# Allegro board modbusDTU.brd
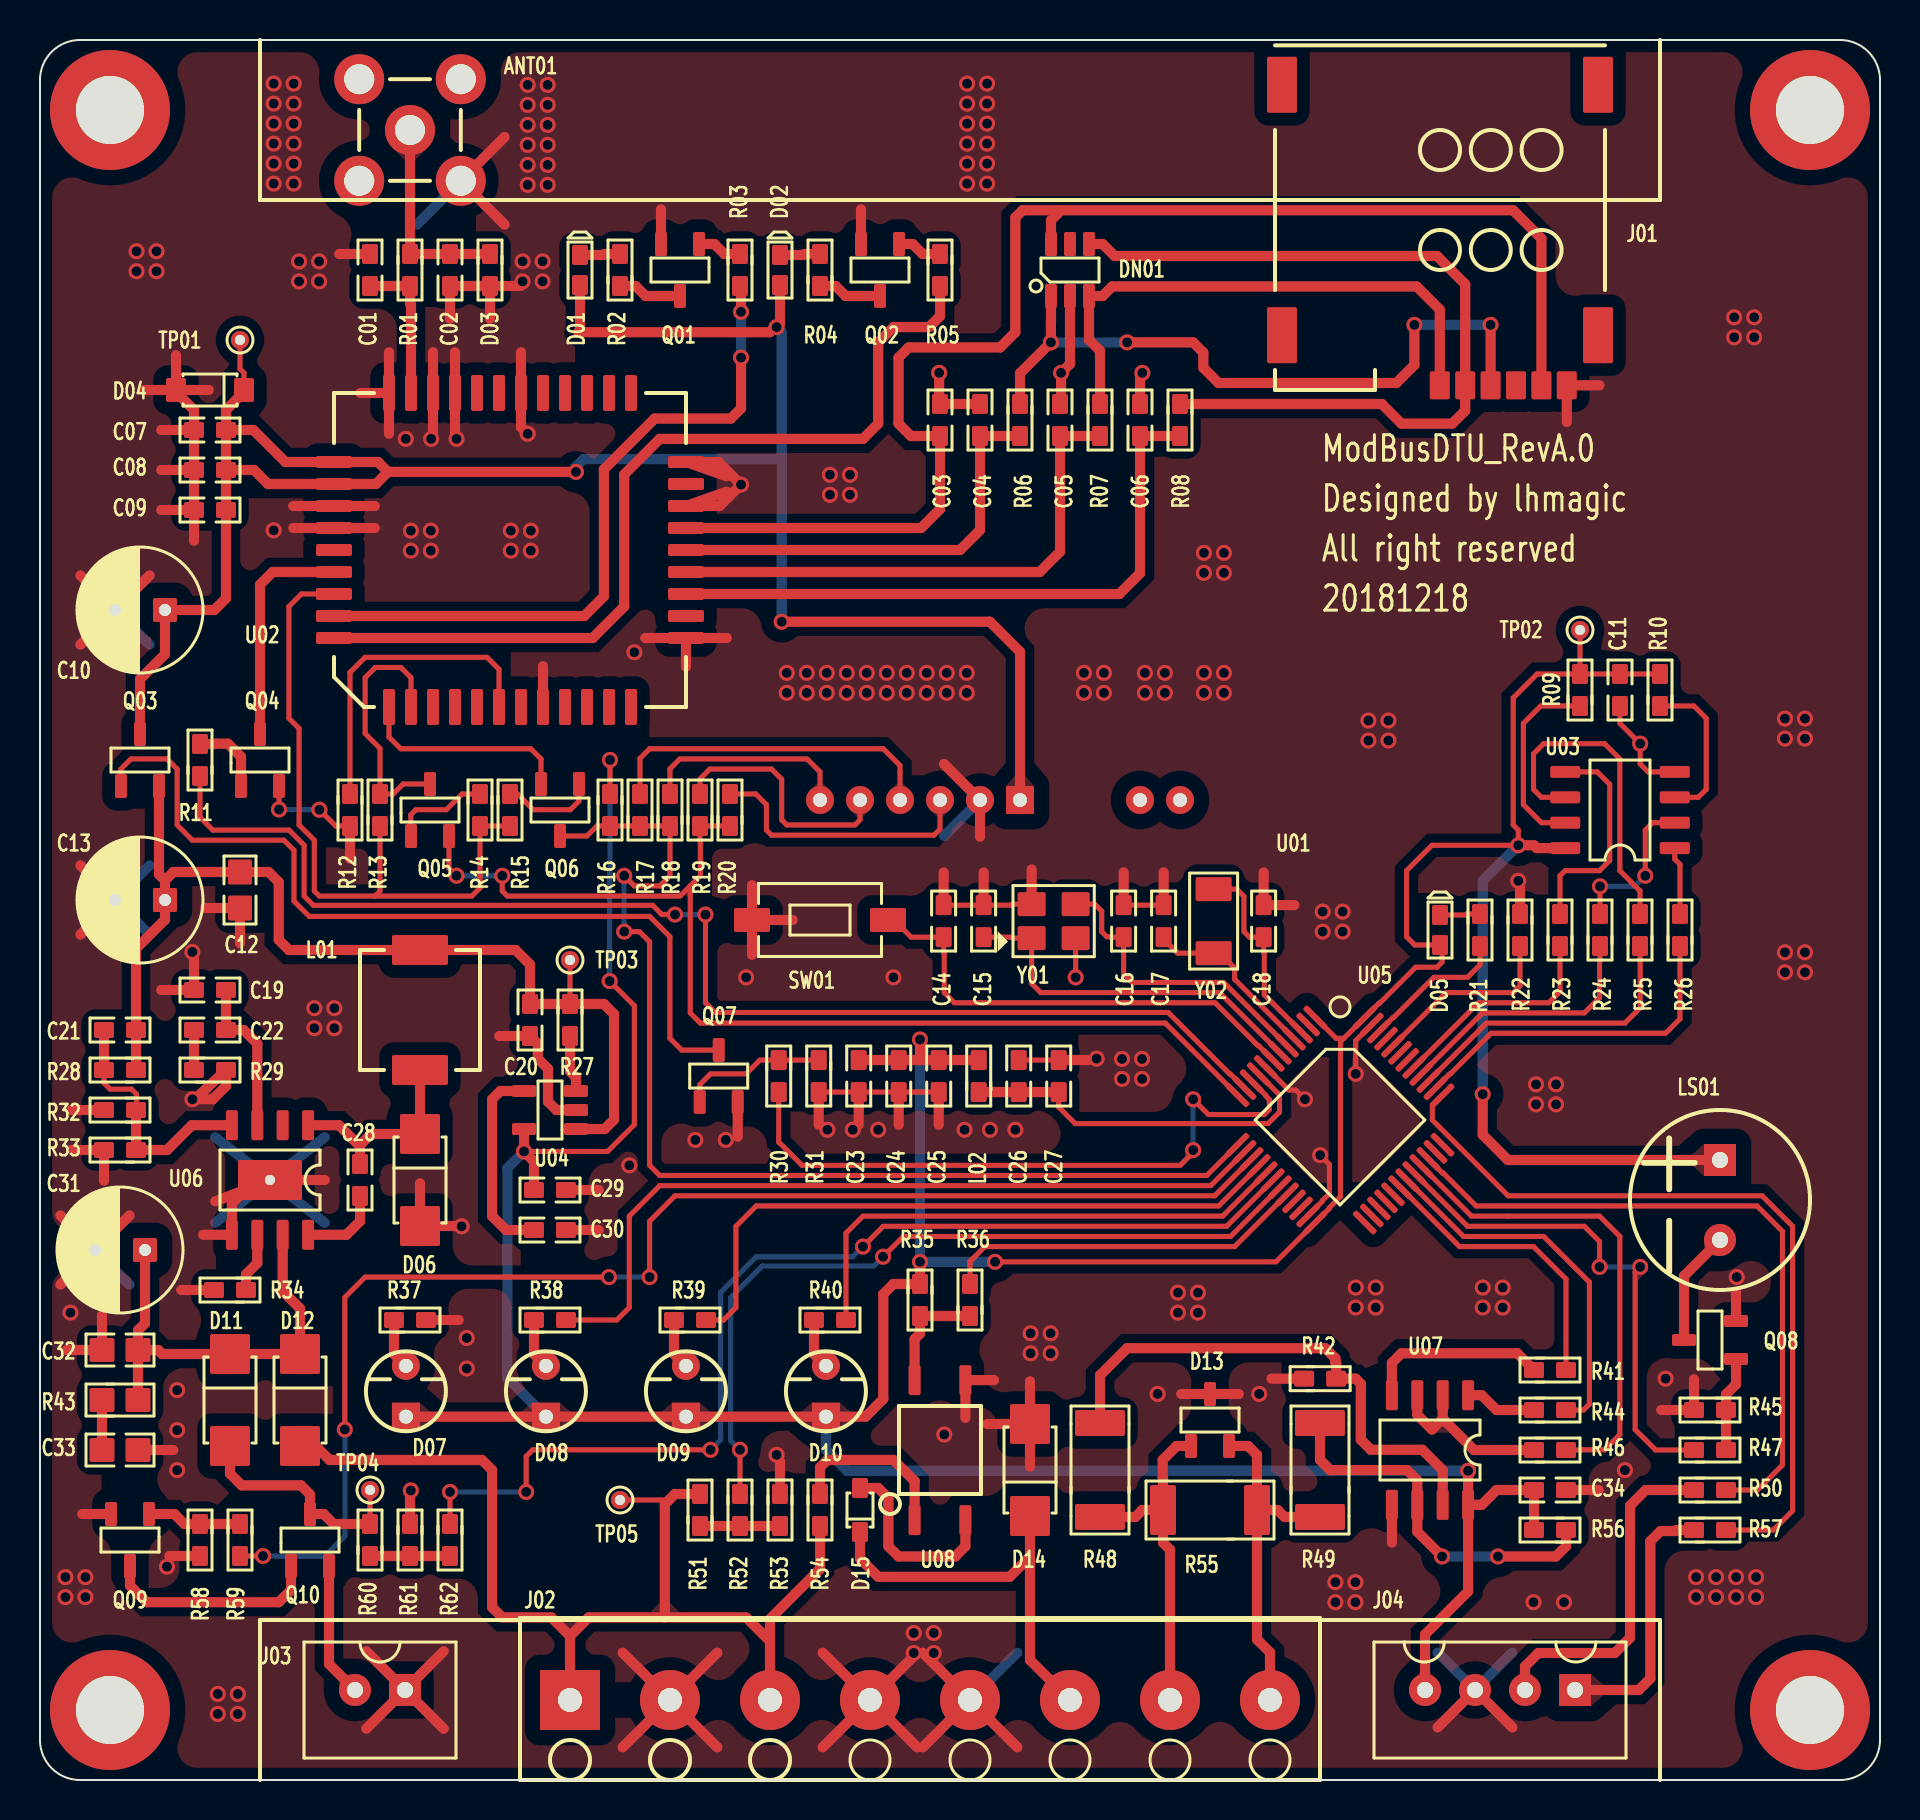
[diagram p0: board, top side]
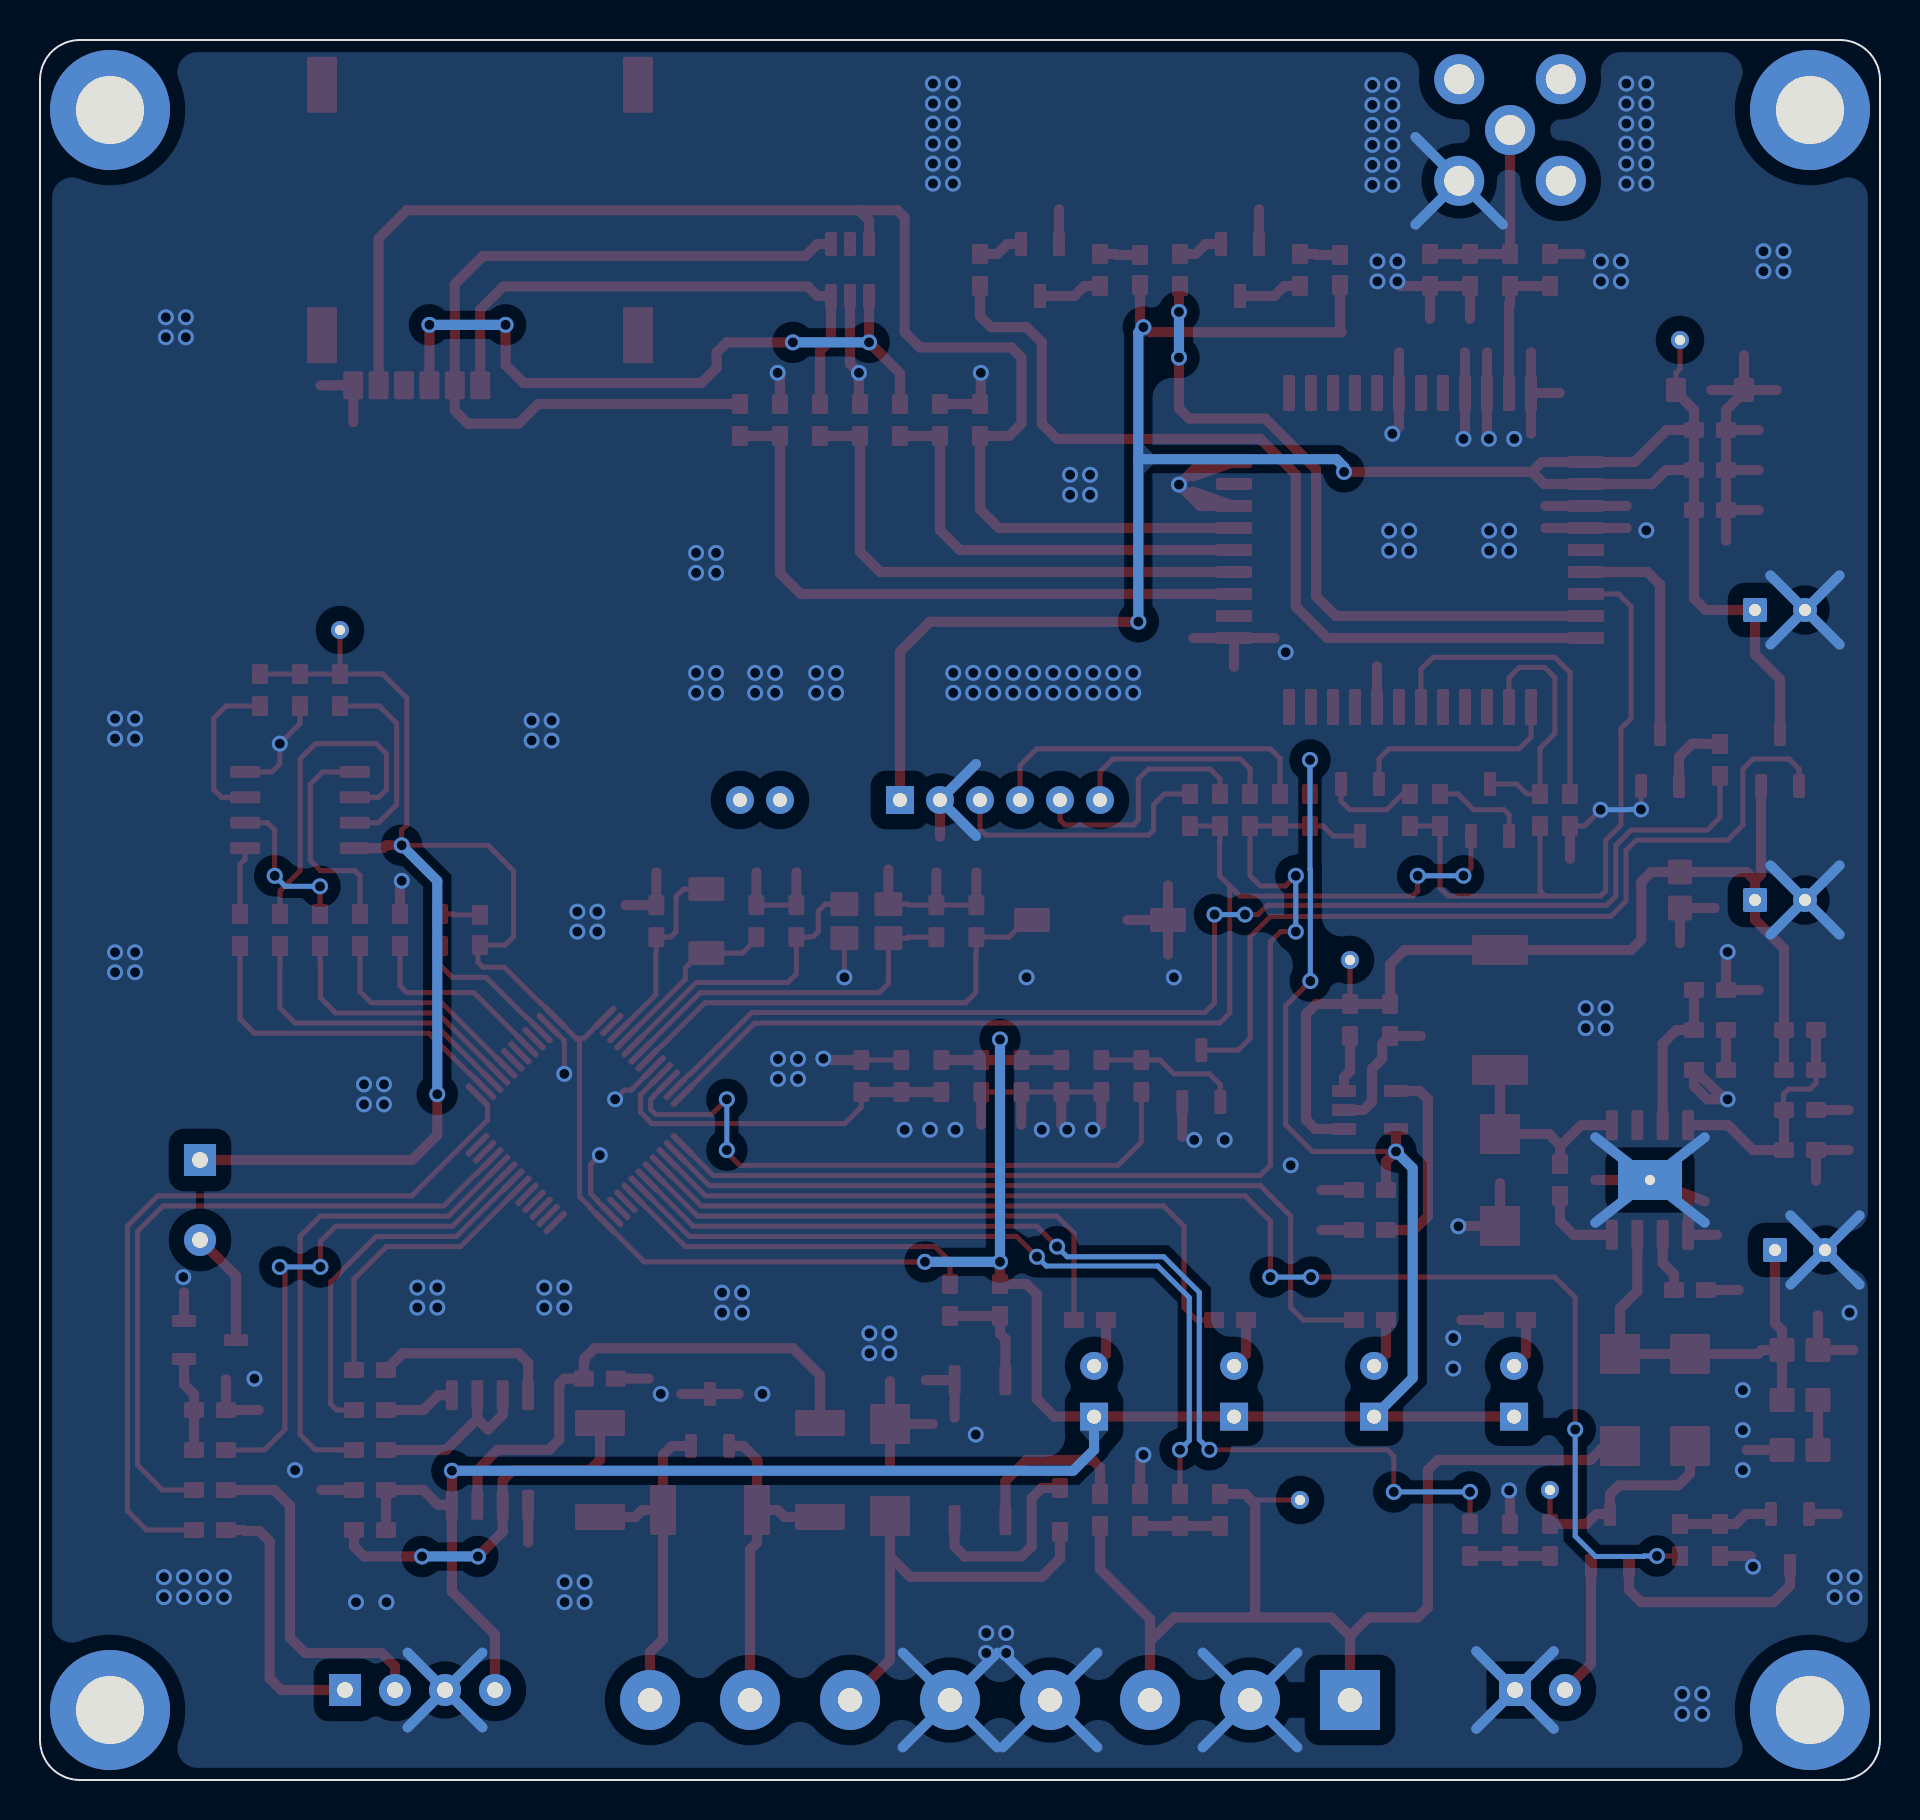
[diagram p1: board, bottom side, seen from below]

Outline 92 x 87 mm; copper layers: TOP, BOTTOM. Coordinates in mm from the lower left corner of the outline.
Outline path: 0,85 0,2 arc(0.59,0.59) 2,0 90,0 arc(91.41,0.59) 92,2 92,85 arc(91.41,86.41) 90,87 2,87 arc(0.59,86.41) 0,85

## Design rules (mm)
constraint set DEFAULT: min track width 0.254

## Placement (name value [footprint] x y rotation side)
ANT01  ANT  [RF-SMA]  18.5 82.5 270 top
C01  NF  [C0603]  16.5 75.5 90 top
C02  NF  [C0603]  20.5 75.5 270 top
C03  0.1uF  [C0603]  45 68 90 top
C04  22pF  [C0603]  47 68 90 top
C05  22pF  [C0603]  51 68 90 top
C06  22pF  [C0603]  55 68 90 top
C07  33pF  [C0603]  8.5 67.5 180 top
C08  10pF  [C0603]  8.5 65.5 180 top
C09  2.2uF/16V  [C0603]  8.5 63.5 180 top
C10  100uF/16V  [CAPE6X2R50]  5 58.5 180 top
C11  0.1uF  [C0603]  79 54.5 270 top
C12  10uF/10v  [C0805]  10 44.5 270 top
C13  100uF/16V  [CAPE6X2R50]  5 44 180 top
C14  0.1uF  [C0603]  45.18 42.94 90 top
C15  33pF  [C0603]  47.18 42.94 90 top
C16  33pF  [C0603]  54.18 42.94 90 top
C17  22pF  [C0603]  56.18 42.94 90 top
C18  22pF  [C0603]  61.18 42.94 90 top
C19  10pF  [C0603]  8.5 39.5 180 top
C20  2.2uF/16V  [C0603]  24.5 38 270 top
C21  10pF  [C0603]  4 37.5 180 top
C22  150pF  [C0603]  8.5 37.5 180 top
C23  0.1uF  [C0603]  40.94 35.2 270 top
C24  0.1uF  [C0603]  42.94 35.2 270 top
C25  4.7uF  [C0603]  44.94 35.2 270 top
C26  10nF  [C0603]  48.94 35.2 90 top
C27  1uF  [C0603]  50.94 35.2 90 top
C28  0.1uF  [C0603]  16 30 270 top
C29  2.2uF/16V  [C0603]  25.5 29.5 0 top
C30  22nF  [C0603]  25.5 27.5 0 top
C31  47uF/50V  [CAPE6X2R50]  4 26.5 180 top
C32  2.2uF/50V  [C0805]  4 21.5 0 top
C33  2.2uF/50V  [C0805]  4 16.5 180 top
C34  0.1uF  [C0603]  75.5 14.5 0 top
D01  RED  [LED0603]  27 75.5 270 top
D02  GREEN  [LED0603]  37 75.5 270 top
D03  PGB1010603NR  [R0603]  22.5 75.5 90 top
D04  MM1Z5V1  [SOD-123]  8.5 69.5 180 top
D05  RED  [LED0603]  70 42.5 270 top
D06  SS14  [SMA]  19 30 270 top
D07  RED  [LED-3MM]  18.3 19.44 90 top
D08  GREEN  [LED-3MM]  25.3 19.44 90 top
D09  GREEN  [LED-3MM]  32.3 19.44 90 top
D10  GREEN  [LED-3MM]  39.3 19.44 90 top
D11  SS14  [SMA]  9.5 19 270 top
D12  SS14  [SMA]  13 19 270 top
D13  PSM712  [SOT23-3]  58.5 18 270 top
D14  SMAJ36CA  [SMA]  49.5 15.5 90 top
D15  1N4148WS  [SOD-323]  41 13.5 90 top
DN01  ESDA6V1-5SC6  [SOT23-6]  51.5 75.5 270 top
J01  SIM-002-T6  [SIM-MICRO]  70 78.5 180 top
J02  CONN PCB 8  [CON5MM-8P]  39 4 0 top
J03  CONN PCB 2  [XH-2A]  17 4.5 180 top
J04  SWD  [XH-4A]  73 4.5 180 top
L01  SLO0630H150MTT  [INDC-SLF6028]  19 38.5 90 top
L02  CBG160808U600T  [R0603]  46.94 35.2 270 top
LS01  QMB-09B-03  [BZ09B]  84 29 270 top
NOREF  -  [unnamed]  3.5 83.5 90 top
NOREF#2  -  [unnamed]  3.5 3.5 90 top
NOREF#3  -  [unnamed]  88.5 83.5 90 top
NOREF#4  -  [#2]  0 0 0 top
NOREF#5  -  [unnamed]  88.5 3.5 90 top
NOREF#6  -  [#2]  -2 0 90 top
Q01  2N7002  [SOT23-3]  32 75.5 90 top
Q02  2N7002  [SOT23-3]  42 75.5 90 top
Q03  AO3401A  [SOT23-3]  5 51 270 top
Q04  2N7002  [SOT23-3]  11 51 270 top
Q05  MMBT5551  [SOT23-3]  19.5 48.5 270 top
Q06  MMBT5551  [SOT23-3]  26 48.5 90 top
Q07  2N7002  [SOT23-3]  33.94 35.2 270 top
Q08  2N7002  [SOT23-3]  83.5 22 0 top
Q09  2N7002  [SOT23-3]  4.5 12 90 top
Q10  AO3401A  [SOT23-3]  13.5 12 270 top
R01  0R  [R0603]  18.5 75.5 90 top
R02  1K  [R0603]  29 75.5 270 top
R03  1K  [R0603]  35 75.5 90 top
R04  1K  [R0603]  39 75.5 270 top
R05  1K  [R0603]  45 75.5 90 top
R06  51R  [R0603]  49 68 90 top
R07  51R  [R0603]  53 68 90 top
R08  51R  [R0603]  57 68 90 top
R09  10K  [R0603]  77 54.5 270 top
R10  10K  [R0603]  81 54.5 270 top
R11  1K  [R0603]  8 51 270 top
R12  10K  [R0603]  15.5 48.5 90 top
R13  10K  [R0603]  17 48.5 270 top
R14  1K  [R0603]  22 48.5 90 top
R15  1K  [R0603]  23.5 48.5 90 top
R16  10K  [R0603]  28.5 48.5 90 top
R17  100R  [R0603]  30 48.5 270 top
R18  NF  [R0603]  31.5 48.5 270 top
R19  NF  [R0603]  33 48.5 270 top
R20  100R  [R0603]  34.5 48.5 270 top
R21  1K  [R0603]  72 42.5 90 top
R22  10K  [R0603]  74 42.5 90 top
R23  1K  [R0603]  76 42.5 270 top
R24  1K  [R0603]  78 42.5 270 top
R25  1K  [R0603]  80 42.5 270 top
R26  1K  [R0603]  82 42.5 270 top
R27  10K  [R0603]  26.5 38 90 top
R28  100K  [R0603]  4 35.5 0 top
R29  100K  [R0603]  8.5 35.5 180 top
R30  1K  [R0603]  36.94 35.2 90 top
R31  10K  [R0603]  38.94 35.2 90 top
R32  100K  [R0603]  4 33.5 0 top
R33  24K  [R0603]  4 31.5 0 top
R34  200K  [R0603]  9.5 24.5 0 top
R35  30K  [R0603]  44 24 90 top
R36  1K  [R0603]  46.5 24 270 top
R37  1K  [R0603]  18.5 23 180 top
R38  1K  [R0603]  25.5 23 180 top
R39  1K  [R0603]  32.5 23 180 top
R40  1K  [R0603]  39.5 23 180 top
R41  1K  [R0603]  75.5 20.5 180 top
R42  4.7K  [R0603]  64.01 20.07 180 top
R43  2R  [R0805]  4 19 180 top
R44  1K  [R0603]  75.5 18.5 180 top
R45  10K  [R0603]  83.5 18.5 0 top
R46  1K  [R0603]  75.5 16.5 180 top
R47  1K  [R0603]  83.5 16.5 180 top
R48  22R  [R2010]  53 15.5 270 top
R49  22R  [R2010]  64 15.5 270 top
R50  100R  [R0603]  83.5 14.5 180 top
R51  100K  [R0603]  33 13.5 270 top
R52  1K  [R0603]  35 13.5 90 top
R53  10K  [R0603]  37 13.5 90 top
R54  20K  [R0603]  39 13.5 90 top
R55  120R  [R2010]  58.5 13.5 0 top
R56  4.7K  [R0603]  75.5 12.5 0 top
R57  100R  [R0603]  83.5 12.5 180 top
R58  10K  [R0603]  8 12 90 top
R59  1K  [R0603]  10 12 90 top
R60  100K  [R0603]  16.5 12 270 top
R61  33K  [R0603]  18.5 12 90 top
R62  1K  [R0603]  20.5 12 90 top
SW01  SW-PB-2  [SW-3X6]  39 43 180 top
TP01  TP  [TP1]  10 72 0 top
TP02  TP  [TP1]  77 57.5 0 top
TP03  TP  [TP1]  26.5 41 0 top
TP04  TP  [TP1]  16.5 14.5 0 top
TP05  TP  [TP1]  29 14 0 top
U01  -  [SIM800C_P0V0]  49 49 180 top
U02  -  [SIM800C]  23.5 61.5 90 top
U03  P25Q40  [SOIC-8]  79 48.5 90 top
U04  RT9193-33GB  [SOT23-5]  25.5 33.5 0 top
U05  STM32F030C8  [LQFP-48]  65 33 225 top
U06  MP2560  [SOIC-8P]  11.5 30 180 top
U07  SP3485  [SOIC-8]  69.5 16.5 180 top
U08  EL354  [SOP-4]  45 16.5 90 top
Y01  12MHz  [SMD3225-4]  50.68 42.94 0 top
Y02  32.768K  [SMD3215]  58.68 42.94 90 top

## Library data of the parts
ANT01 = ANT
C01 C02 C03 C04 C05 C06 C07 C08 C09 C11 C14-C18 C23-C27 C34 = CAP NP
C10 C13 C31 = CAP POL
C12 C19 C21 C22 C28 C32 C33 = CAP NP: room: MP2560
C20 C29 C30 = CAP NP: room: MP2451
D01 D02 D05 D07 D08 D09 D10 = LED
D03 = DIODE BI-DIR
D04 = DIODE ZENER
D06 = DIODE SCHOTTKY: room: MP2560
D11 D12 = DIODE SCHOTTKY: room: MP2451
D13 = TVS_BD
D14 = DIODE TVS
D15 = DIODE
DN01 = DTVSARR_CA_5/SOT23
J01 = SIM
J02 = CONN PCB 8
J03 = CONN PCB 2
J04 = CONN PCB 4
L01 L02 = INDUCTOR
LS01 = BUZZER
Q01 Q02 Q04 Q07 Q08 Q09 = NMOS
Q03 Q10 = PMOS
Q05 Q06 = NPN
R01 R02 R03 R04 R05 R09-R11 R13-R26 R30 R35-R57 R59-R62 = RES
R06 R07 R08 R12 R27 R31 R58 = RES: room: MP2451
R28 R29 R32 R34 = RES: room: MP2560
R33 = RESISTOR
SW01 = SW-PB-2
TP01 TP02 TP03 TP04 TP05 = TP
U01 = SIM800C_P0V0
U02 = SIM800C
U03 = W25Q16
U04 = RT9193
U05 = STM32F030C8
U06 = MP2560
U07 = SP485
U08 = EL354
Y01 = CRYSTAL-1
Y02 = CRYSTAL

## Footprints (pads in the part's own frame, mm; a bottom-side part is the same pattern mirrored in y, then rotated)
BZ09B
  rect 1.6x1.6 hole 0.8: 1(-2,0)
  round 1.6 hole 0.8: 2(2,0)
C0603
  rrect 1x0.8 smd: 1(-0.8,0) 2(0.8,0)
C0805
  rrect 1.25x1.2 smd: 1(-0.9,0) 2(0.9,0)
CAPE6X2R50
  rrect 1.2x1.2 hole 0.6: 1(-1.25,0)
  round 1.2 hole 0.6: 2(1.25,0)
CON5MM-8P
  rect 3x3 hole 1.2: 1(-12.5,0)
  round 3 hole 1.2: 2(-7.5,0) 3(-2.5,0) 4(2.5,0) 5(7.5,0) 6(12.5,0) 7(17.5,0) 8(22.5,0)
INDC-SLF6028
  rrect 1.5x2.8 smd: 1(-3,0) 2(3,0)
LED0603
  rrect 1x0.8 smd: 1(0.75,0) 2(-0.75,0)
LED-3MM
  rect 1.4x1.4 hole 0.7: 1(-1.27,0)
  round 1.4 hole 0.7: 2(1.27,0)
LQFP-48
  rrect 0.3x1.5 smd: 1(-2.75,-4.5) 2(-2.25,-4.5) 3(-1.75,-4.5) 4(-1.25,-4.5) 5(-0.75,-4.5) 6(-0.25,-4.5) 7(0.25,-4.5) 8(0.75,-4.5) 9(1.25,-4.5) 10(1.75,-4.5) 11(2.25,-4.5) 12(2.75,-4.5) 25(2.75,4.5) 26(2.25,4.5) 27(1.75,4.5) 28(1.25,4.5) 29(0.75,4.5) 30(0.25,4.5) 31(-0.25,4.5) 32(-0.75,4.5) 33(-1.25,4.5) 34(-1.75,4.5) 35(-2.25,4.5) 36(-2.75,4.5)
  rrect 1.5x0.3 smd: 13(4.5,-2.75) 14(4.5,-2.25) 15(4.5,-1.75) 16(4.5,-1.25) 17(4.5,-0.75) 18(4.5,-0.25) 19(4.5,0.25) 20(4.5,0.75) 21(4.5,1.25) 22(4.5,1.75) 23(4.5,2.25) 24(4.5,2.75) 37(-4.5,2.75) 38(-4.5,2.25) 39(-4.5,1.75) 40(-4.5,1.25) 41(-4.5,0.75) 42(-4.5,0.25) 43(-4.5,-0.25) 44(-4.5,-0.75) 45(-4.5,-1.25) 46(-4.5,-1.75) 47(-4.5,-2.25) 48(-4.5,-2.75)
R0603
  rrect 1x0.8 smd: 1(-0.8,0) 2(0.8,0)
R0805
  rrect 1.25x1.2 smd: 1(-0.9,0) 2(0.9,0)
R2010
  rrect 1.3x2.5 smd: 1(-2.35,0) 2(2.35,0)
RF-SMA
  round 2.5 hole 1.5: (-2.54,2.54) (-2.54,-2.54) (2.54,-2.54) 1(0,0) 2(2.54,2.54)
SIM800C
  rrect 1.8x0.6 smd: 1(-7.85,6.05) 2(-7.85,4.95) 3(-7.85,3.85) 4(-7.85,2.75) 5(-7.85,1.65) 6(-7.85,0.55) 7(-7.85,-0.55) 8(-7.85,-1.65) 9(-7.85,-2.75) 10(-7.85,-3.85) 11(-7.85,-4.95) 12(-7.85,-6.05) 22(7.85,-6.05) 23(7.85,-4.95) 24(7.85,-3.85) 25(7.85,-2.75) 26(7.85,-1.65) 27(7.85,-0.55) 28(7.85,0.55) 29(7.85,1.65) 30(7.85,2.75) 31(7.85,3.85) 32(7.85,4.95) 33(7.85,6.05)
  rrect 0.6x1.8 smd: 13(-4.4,-8.8) 14(-3.3,-8.8) 15(-2.2,-8.8) 16(-1.1,-8.8) 17(0,-8.8) 18(1.1,-8.8) 19(2.2,-8.8) 20(3.3,-8.8) 21(4.4,-8.8) 34(4.4,8.8) 35(3.3,8.8) 36(2.2,8.8) 37(1.1,8.8) 38(0,8.8) 39(-1.1,8.8) 40(-2.2,8.8) 41(-3.3,8.8) 42(-4.4,8.8)
SIM800C_P0V0
  round 1.4 hole 0.7: (-8,0) (-6,0) 2(2,0) 3(4,0) 4(6,0) 5(8,0) 6(10,0)
  rect 1.4x1.4 hole 0.7: 1(0,0)
SIM-MICRO
  rrect 1.5x2.8 smd: (-7.9,6.26) (-7.9,-6.26) (7.9,6.26) (7.9,-6.26)
  rrect 1x1.4 smd: 1(-5.07,8.765) 2(-2.53,8.765) 3(0.01,8.765) 4(-6.34,8.765) 5(-3.8,8.765) 6(-1.26,8.765)
SMA
  rrect 2x2 smd: 1(2.3,0) 2(-2.3,0)
SMD3215
  rrect 1.2x1.8 smd: 1(-1.6,0) 2(1.6,0)
SMD3225-4
  rrect 1.4x1.2 smd: 1(-1.1,-0.85) 2(1.1,-0.85) 3(1.1,0.85) 4(-1.1,0.85)
SOD-123
  rrect 1x1.2 smd: 1(1.7,0) 2(-1.7,0)
SOD-323
  rrect 1x0.8 smd: 1(1.1,0) 2(-1.1,0)
SOIC-8
  rrect 0.6x1.5 smd: 1(-1.905,-2.74) 2(-0.635,-2.74) 3(0.635,-2.74) 4(1.905,-2.74) 5(1.905,2.74) 6(0.635,2.74) 7(-0.635,2.74) 8(-1.905,2.74)
SOIC-8P
  rrect 0.6x1.5 smd: 1(-1.905,-2.74) 2(-0.635,-2.74) 3(0.635,-2.74) 4(1.905,-2.74) 5(1.905,2.74) 6(0.635,2.74) 7(-0.635,2.74) 8(-1.905,2.74)
  rrect 3.2x2 hole 0.5: 9(0,0)
SOP-4
  rrect 1.5x0.6 smd: 1(-3.505,1.27) 2(-3.505,-1.27) 3(3.495,-1.27) 4(3.495,1.27)
SOT23-3
  rrect 1.2x0.6 smd: 1(1.3,-0.95) 2(1.3,0.95) 3(-1.3,0)
SOT23-5
  rrect 1.2x0.6 smd: 1(1.3,-0.95) 2(1.3,0) 3(1.3,0.95) 4(-1.3,0.95) 5(-1.3,-0.95)
SOT23-6
  rrect 1.2x0.6 smd: 1(1.3,-0.95) 2(1.3,0) 3(1.3,0.95) 4(-1.3,0.95) 5(-1.3,0) 6(-1.3,-0.95)
SW-3X6
  rrect 1.8x1.2 smd: 1(-3.4,0) 2(3.4,0)
TP1
  round 0.9 hole 0.5: 1(0,0)
unnamed
  round 6 hole 3.4: (0,0)
XH-2A
  rect 1.6x1.6 hole 0.8: 1(-1.25,0)
  round 1.6 hole 0.8: 2(1.25,0)
XH-4A
  rect 1.6x1.6 hole 0.8: 1(-3.75,0)
  round 1.6 hole 0.8: 2(-1.25,0) 3(1.25,0) 4(3.75,0)

## Nets
+3V3: C11.1 C23.1 C24.1 C25.1 C29.1 C34.1 D05.1(CATHODE) D07.1(CATHODE) D08.1(CATHODE) D09.1(CATHODE) D10.1(CATHODE) J04.4 L02.1 LS01.1 R09.1 R10.1 R16.2 R35.2 R56.1 TP02.1 U03.8 U04.5(VOUT) U05.1 U05.24 U05.48 U07.8(VCC)
GND: ANT01.2(GND) C01.2 C02.2 C03.2 C04.2 C05.2 C06.2 C07.2 C08.2 C09.2 C10.2 C11.2 C12.2 C13.2 C14.2 C15.2 C16.2 C17.2 C18.2 C19.2 C20.2 C23.2 C24.2 C25.2 C26.2 C27.2 C29.2 C30.2 C31.2 C32.1 C33.1 C34.2 D03.1 D04.1(CATHODE) D06.1(CATHODE) D13.3 D14.1 DN01.2 J01.4 J02.2 J02.4 J02.5 J03.1 J04.3 Q01.2(SOURCE) Q02.2(SOURCE) Q04.2(SOURCE) Q07.2(SOURCE) Q08.2(SOURCE) Q09.2(SOURCE) R12.1 R22.2 R29.1 R31.1 R32.1 R33.1 R34.1 R37.1 R42.2 R45.1 R53.2 R58.1 R61.2 SW01.2 U01.2 U02.8 U02.13 U02.19 U02.21 U02.27 U02.30 U02.31 U02.33 U02.36 U02.37 U03.4 U04.2 U05.8 U05.23 U05.47 U06.5 U06.9 U07.5 U08.3(EMITTER) Y01.2 Y01.4
VBAT: J03.2 Q10.2(SOURCE)
VCC: C12.1 C13.1 C20.1 C21.1 L01.2 Q03.2(SOURCE) R27.2 R28.2 TP03.1 U04.1
VIN: D12.1(CATHODE) J02.1 J02.3 R51.1 R54.1 TP05.1
ADC_VBAT: R62.2 U05.18
ADC_VIN: R52.2 U05.19
BAT_PWR: R59.1 U05.15
BEEP: R47.2 U05.32
BOOT0: R22.1 U05.44
DBG_LED: R21.1 U05.46(PB9)
FLASH_MISO: R24.2 U05.40
FLASH_MOSI: R23.2 U05.41
FLASH_NSS: R26.2 U05.38
FLASH_SCK: R25.2 U05.39
GSM_LED: R40.1 U05.17
GSM_PWR: R30.1 U05.10
GSM_PWRKEY: R11.2 U05.11
GSM_RX: Q06.3 R16.1 R17.2 R18.2 U05.13
GSM_TX: Q05.2(E) R19.2 R20.2 U05.12
KEY_IN: R36.1 U05.20
NRST: C14.1 SW01.1 U05.7
OSC_IN: C16.1 U05.5 Y01.3
OSC_OUT: C15.1 U05.6 Y01.1
RS485_DE: R46.1 U05.33
RS485_LED: R39.1 U05.16
RS485_RX: R44.1 U05.31
RS485_TX: R41.1 U05.30
RS485A: D13.2 J02.8 R49.2 R55.2
RS485B: D13.1 J02.7 R48.2 R55.1
STATUS_LED: R38.1 U05.14
USB_VBUS: U02.24
USER_KEY: D14.2(CATHODE) D15.2 J02.6
VGSM: C07.1 C08.1 C09.1 C10.1 D01.1(CATHODE) D02.1(CATHODE) D04.2 Q03.3 TP01.1 U01.1(VCC) U02.34 U02.35
VRTC: U02.28(VRTC)
N425748: C31.1 C32.2 D11.2 D12.2 R43.1 U06.7(VIN)
N425772: C28.1 D06.2 L01.1 U06.1
N425872: C28.2 U06.8
N425896: R34.2 U06.6
N425904: C21.2 R28.1 R32.2 R33.2 U06.4
N425936: C19.1 C22.1 U06.3
N425988: C33.2 R43.2
N426114: C22.2 R29.2
N675915: C30.1 U04.4
N679655: C26.1 C27.1 L02.2 U05.9
N679821: R50.1 U05.34
N679845: R57.1 U05.37
N680958: C18.1 U05.3 Y02.2
N680988: C17.1 U05.4 Y02.1
N682371: R49.1 R56.2 U07.6
N682479: R46.2 U07.2 U07.3
N682487: R42.1 R48.1 U07.7
N693789: R25.1 U03.6
N693827: R10.2 U03.3(W\P\)
N693831: R23.1 U03.5
N693881: R09.2 U03.7
N693885: R24.1 U03.2
N693911: R26.1 U03.1
N700450: J04.2 R50.2
N700462: J04.1 R57.2
N702312: R27.1 U04.3
N733834: C03.1 DN01.6 J01.1 U02.18
N733870: DN01.3 J01.3 R07.2
N733890: DN01.4 J01.6 R08.2
N733894: DN01.1 J01.2 R06.2
N733954: C05.1 R07.1 U02.16
N733962: C06.1 R08.1 U02.15
N733966: C04.1 R06.1 U02.17
N737146: R12.2 U02.6
N742894: R03.1 U02.41
N742916: R05.1 U02.42
N742971: D01.2 R02.1
N743013: D02.2 R04.1
N743392: Q02.3 R04.2
N743399: Q02.1 R05.2
N743403: Q01.1 R03.2
N743407: Q01.3 R02.2
N743623: Q04.3 U02.39
N743725: Q04.1 R11.1
N743818: C01.1 R01.1 U02.32
N743850: ANT01.1 C02.1 D03.2 R01.2
N763521: R18.1 U01.6
N763565: R19.1 U01.5
N763599: R17.1 U01.4
N763631: R20.1 U01.3
N767106: R51.2 R52.1 R53.1
N767247: D11.1(CATHODE) Q10.3 R60.1 TP04.1
N768259: R60.2 R61.1 R62.1
N768827: Q09.3 Q10.1
N768881: Q09.1 R58.2 R59.2
N770522: Q03.1 Q07.3
N770558: Q07.1 R30.2 R31.2
N773160: R54.2 U08.1
N773184: R35.1 R36.2 U08.4
N773276: D15.1(K) U08.2
N774903: LS01.2(B) Q08.3
N774939: Q08.1 R45.2 R47.1
N798879: R44.2 U07.1
N798889: R41.2 U07.4
N803622: D07.2 R37.2
N803626: D08.2 R38.2
N803630: D09.2 R39.2
N803634: D10.2 R40.2
N806128: D05.2 R21.2
N817284: R13.2 R14.1 R15.1 U02.40
N822315: Q05.3 R13.1 U02.2
N822319: Q06.2(E) U02.1
N822323: Q05.1 R14.2
N822327: Q06.1 R15.2

Pads without a net: DN01 5; J01 5; U02 3 4 5 7 9 10 11 12 14 20 22 23 25 26 29 38; U05 2 21 22 25 26 27 28 29 35 36 42 43 45; U06 2

## Via types
v1: diameter 0.8, hole 0.5, TOP to BOTTOM, 260 vias

## Routing (per net, layer and track width the routed paths; a pad name or vN(x,y) marks a point on that pad's centre or on a via; arc(x,y) is an arc through that point)
+3V3: length 245.1
  TOP w0.254: R16.2 v1(28.5,51) ; R09.1 74.86,55.3 73.66,54.1 73.66,47.75 73.91,47.5 v1(73.91,46.74) 69.6,46.74 68.33,45.47 68.33,42.16 68.74,41.75 D05.1 70.1,41.65 70.1,40.89 69.85,40.64 68.78,40.64 66.98,38.84 66.95,38.84 U05.48 65.19,37.08 ; R09.1 TP02.1 ; R09.1 C11.1 R10.1 ; U05.1 64.81,37.08 65.19,37.08 ; 65.19,37.08 65.02,36.91 65.02,29.17 64.47,28.62 64.47,28.58 U05.24 61.8,25.91 v1(47.75,25.91) ; v1(24.2,31.43) 28.38,31.43 29.72,32.77 29.72,38.71 v1(28.48,39.95)
  TOP w0.508: U04.5 v1(24.2,31.43) 24.7,30.93 C29.1 ; L02.1 C25.1 43.94,36 ; 43.94,36 C24.1 C23.1 ; 43.94,36 44,36.06 v1(44,37.03) ; LS01.1 73.39,31 72.14,32.26 v1(72.14,34.29) ; U07.8 72.09,13.76 72.83,14.5 C34.1 R56.1 ; U07.8 71.41,9.43 69.25,7.27 J04.4 ; U07.8 v1(71.41,15.46) ; U03.8 74.84,46.59 74.69,46.74 v1(73.91,46.74) ; v1(44,25.91) R35.2 42.67,24.8 42.16,24.29 42.16,19.05 41.28,18.17 D10.1 D09.1 D08.1 D07.1
  BOTTOM w0.254: v1(28.48,39.95) 28.48,45.51 28.5,45.53 v1(28.5,51)
  BOTTOM w0.508: D10.1 39.3,16.51 40.34,15.46 v1(71.41,15.46) ; v1(47.75,25.91) v1(44,25.91) v1(44,37.03) ; D08.1 23.37,20.09 23.37,30.59 v1(24.2,31.43) ; v1(73.91,46.74) 72.14,44.96 v1(72.14,34.29)
GND: length 435.2
  TOP w0.254: Q04.2 v1(11.95,48.53) ; C14.2 C15.2 48.58,43.74 48.63,43.79 Y01.4 ; C25.2 C24.2 C23.2 R31.1 ; v1(65.79,35.31) 65.79,36.97 66.59,37.77 ; C16.2 C17.2 ; C11.2 79,52.83 v1(80.01,51.82) 80.01,50.8 80.41,50.41 U03.4 ; R12.1 14.78,47.7 v1(13.97,48.51) ; C26.2 C27.2 ; Y01.2 v1(51.78,40.13) ; v1(63.25,34.04) 62.78,34.5 62.44,34.5 U05.8 ; v1(64.01,31.24) 64.47,30.78 64.47,29.32 64.12,28.97 64.12,28.94 63.41,28.23
  TOP w0.508: 39.14,1.64 J02.4 ; J02.4 43.86,1.64 ; J02.4 43.86,6.36 ; J02.4 39.14,6.36 ; U02.8 25.15,55.69 ; 1.02,28.23 C31.2 ; C31.2 4.48,28.23 ; C31.2 1.02,24.77 ; 44.14,6.36 J02.5 ; J02.5 44.14,1.64 ; J02.5 48.86,1.64 ; 73.62,2.63 J04.3 69.88,2.63 ; 1.56,31.5 R33.1 3.2,29.96 ; C08.2 C07.2 ; C08.2 C09.2 ; C08.2 6.06,65.5 ; C07.2 7.7,68.5 6.8,69.4 D04.1 ; C07.2 6.06,67.5 ; C16.2 54.18,45.38 ; SW01.2 37.64,43 ; SW01.2 35.6,41.26 ; SW01.2 35.6,44.74 ; 24.05,71.39 U02.27 24.05,67.64 v1(24.38,67.31) ; 7.66,33.96 R29.1 9.3,34.7 8.64,34.04 v1(7.62,34.04) ; C14.2 45.18,45.38 ; C17.2 56.18,45.38 ; 34.89,32.16 Q07.2 ; D03.1 24.04,74.7 ; D03.1 22.5,73.06 ; D03.1 C02.2 20.5,73.06 ; Q02.2 41.05,78.54 ; C15.2 47.18,45.38 ; 6.46,11.2 R58.1 ; 2.02,42.27 C13.2 2.02,45.73 ; 5.16,69.5 D04.1 ; D04.1 8.44,69.5 ; D04.1 6.8,71.24 ; 2.02,56.77 C10.2 ; C10.2 2.02,60.23 ; C10.2 5.48,60.23 ; 8.16,27.26 U06.5 9.6,28.82 10.77,30 U06.9 ; C04.2 C03.2 44.96,68.84 v1(44.96,70.36) ; 3.1,23.24 C32.1 1.34,21.5 ; 62.72,43.74 C18.2 61.18,45.38 ; 16.31,2.56 J03.1 ; J03.1 16.31,6.44 ; J03.1 20.19,2.56 ; J03.1 20.19,6.44 ; 57.06,19.3 D13.3 59.94,19.3 ; C27.2 52.47,36 ; 15.5,46.06 R12.1 ; 20.75,67.31 U02.30 20.75,71.39 ; 82.7,20.04 R45.1 81.06,18.5 ; D14.1 49.5,19.94 ; D14.1 49.5,15.66 ; D14.1 47.36,17.8 ; 67.59,11.87 U07.5 ; 16.01,69.35 U02.33 ; U02.33 17.45,67.31 ; U02.33 17.45,71.39 ; 32.3,55.66 U02.13 ; U02.13 34.34,57.1 ; U02.13 30.26,57.1 ; 61.57,20.07 R42.2 ; 8.26,43.6 C12.2 10,41.84 ; 8.76,28.93 U06.9 ; U06.9 14.24,30 ; 29.14,6.36 J02.2 ; J02.2 33.86,1.64 ; J02.2 29.14,1.64 ; J02.2 33.86,6.36 ; 34.34,65.18 U02.21 33.92,65.9 v1(35.05,64.77) 33.98,63.7 U02.19 34.34,64.42 ; 38.94,32.76 R31.1 ; 7.06,24.5 R34.1 ; 14.96,76.3 C01.2 ; C33.1 6.66,16.5 ; 7.7,41.04 C19.2 6.06,39.5 ; 6.06,63.5 C09.2 ; C09.2 7.7,61.96 ; 23.23,82.15 ANT01.2 23.23,77.77 ; R22.2 74,44.94 ; 12.66,63.7 U02.36 16.74,63.7 ; 12.66,62.6 U02.37 16.74,62.6 ; v1(18.54,14.48) 18.5,14.44 R61.2 ; 19.65,67.31 U02.31 19.65,71.39 ; R53.2 37,15.94 ; DN01.2 51.5,70.8 v1(51.05,70.36) 51.05,68.85 C05.2 ; v1(55.12,70.36) 55,70.24 C06.2 ; 21.14,27.7 D06.1 19,29.84 ; Q08.2 84.8,24.39 ; 76.34,67.9 J01.4 77.98,69.73 ; C30.2 27.94,27.5 ; 22.96,37.2 C20.2 24.89,36.81 24.89,36.07 25.4,35.56 25.4,33.92 25.82,33.5 U04.2 ; 47.71,20 U08.3 46.27,18.11 ; 47,47.16 U01.2 45.2,50.8 ; 42.94,32.76 C24.2 ; R37.1 20.94,23 ; Y01.4 49.58,45.53 ; C34.2 77.94,14.5 ; C29.2 27.94,29.5 ; 1.56,33.5 R32.1 ; Q01.2 31.05,78.54 ; 2.11,13.3 Q09.2 ; 40.94,32.76 C23.2 ; 44.94,32.76 C25.2
  BOTTOM w0.254: v1(11.95,48.53) 12.6,48.53 12.62,48.51 v1(13.97,48.51)
  BOTTOM w0.508: 1.02,24.77 C31.2 ; C31.2 4.48,28.23 ; C31.2 1.02,28.23 ; C31.2 4.48,24.77 ; 44.14,6.36 J02.5 ; J02.5 44.14,1.64 ; J02.5 48.86,6.36 ; J02.5 48.86,1.64 ; ANT01.2 23.23,82.15 ; ANT01.2 18.85,77.77 ; ANT01.2 23.23,77.77 ; 16.31,2.56 J03.1 ; J03.1 20.19,6.44 ; J03.1 16.31,6.44 ; J03.1 20.19,2.56 ; 8.76,32.14 U06.9 ; U06.9 8.76,27.86 ; U06.9 14.24,27.86 ; U06.9 14.24,32.14 ; J02.2 33.86,1.64 ; J02.2 29.14,1.64 ; J02.2 29.14,6.36 ; J02.2 33.86,6.36 ; J04.3 73.62,2.63 ; J04.3 69.88,6.37 ; J04.3 73.62,6.37 ; J04.3 69.88,2.63 ; 45.2,47.2 U01.2 45.2,50.8 ; J02.4 43.86,6.36 ; J02.4 39.14,1.64 ; J02.4 43.86,1.64 ; J02.4 39.14,6.36 ; 2.02,42.27 C13.2 ; C13.2 5.48,45.73 ; C13.2 5.48,42.27 ; C13.2 2.02,45.73 ; 2.02,56.77 C10.2 ; C10.2 5.48,56.77 ; C10.2 5.48,60.23 ; C10.2 2.02,60.23
  vias: v1(1.27,10.14) v1(1.27,9.14) v1(1.52,23.37) v1(2.27,10.14) v1(2.27,9.14) v1(4.83,76.44) v1(4.83,75.44) v1(5.83,76.44) v1(5.83,75.44) v1(6.35,10.67) v1(6.86,19.49) v1(6.86,17.49) v1(6.86,15.49) v1(7.62,41.4) v1(8.89,4.3) v1(8.89,3.3) v1(9.89,4.3) v1(9.89,3.3) v1(11.68,84.82) v1(11.68,83.82) v1(11.68,82.82) v1(11.68,81.82) v1(11.68,80.82) v1(11.68,79.82) v1(11.68,62.48) v1(12.68,84.82) v1(12.68,83.82) v1(12.68,82.82) v1(12.68,81.82) v1(12.68,80.82) v1(12.68,79.82) v1(12.95,75.93) v1(12.95,74.93) v1(13.72,38.59) v1(13.72,37.59) v1(13.95,75.93) v1(13.95,74.93) v1(14.72,38.59) v1(14.72,37.59) v1(18.29,67.06) v1(18.54,62.47) v1(18.54,61.47) v1(19.54,62.47) v1(19.54,61.47) v1(19.56,67.06) v1(20.83,67.06) v1(21.08,27.69) v1(21.34,22.1) v1(21.34,20.57) v1(23.54,62.47) v1(23.54,61.47) v1(24.13,75.93) v1(24.13,74.93) v1(24.38,84.76) v1(24.38,83.76) v1(24.38,82.76) v1(24.38,81.76) v1(24.38,80.76) v1(24.38,79.76) v1(24.54,62.47) v1(24.54,61.47) v1(25.13,75.93) v1(25.13,74.93) v1(25.38,84.76) v1(25.38,83.76) v1(25.38,82.76) v1(25.38,81.76) v1(25.38,80.76) v1(25.38,79.76) v1(29.46,30.73) v1(29.72,56.39) v1(32.77,32) v1(34.29,32) v1(35.31,40.13) v1(36.83,16.26) v1(37.34,55.36) v1(37.34,54.36) v1(38.34,55.36) v1(38.34,54.36) v1(39.34,55.36) v1(39.34,54.36) v1(39.37,32.51) v1(39.5,65.26) v1(39.5,64.26) v1(40.34,55.36) v1(40.34,54.36) v1(40.5,65.26) v1(40.5,64.26) v1(40.64,32.51) v1(41.34,55.36) v1(41.34,54.36) v1(41.91,32.51) v1(42.34,55.36) v1(42.34,54.36) v1(42.67,40.13) v1(43.34,55.36) v1(43.34,54.36) v1(43.69,7.35) v1(43.69,6.35) v1(44.34,55.36) v1(44.34,54.36) v1(44.69,7.35) v1(44.69,6.35) v1(45.21,17.27) v1(45.34,55.36) v1(45.34,54.36) v1(46.23,32.51) v1(46.34,55.36) v1(46.34,54.36) v1(46.35,84.82) v1(46.35,83.82) v1(46.35,82.82) v1(46.35,81.82) v1(46.35,80.82) v1(46.35,79.82) v1(47.35,84.82) v1(47.35,83.82) v1(47.35,82.82) v1(47.35,81.82) v1(47.35,80.82) v1(47.35,79.82) v1(47.5,32.51) v1(48.77,32.51) v1(49.53,22.34) v1(49.53,21.34) v1(50.53,22.34) v1(50.53,21.34) v1(52.2,55.36) v1(52.2,54.36) v1(52.83,36.07) v1(53.2,55.36) v1(53.2,54.36) v1(54.1,36.05) v1(54.1,35.05) v1(55.1,36.05) v1(55.1,35.05) v1(55.24,55.36) v1(55.24,54.36) v1(55.88,19.3) v1(56.24,55.36) v1(56.24,54.36) v1(56.9,24.37) v1(56.9,23.37) v1(57.9,24.37) v1(57.9,23.37) v1(58.2,61.36) v1(58.2,60.36) v1(58.2,55.36) v1(58.2,54.36) v1(59.2,61.36) v1(59.2,60.36) v1(59.2,55.36) v1(59.2,54.36) v1(60.96,19.3) v1(64.13,43.42) v1(64.13,42.42) v1(64.77,9.89) v1(64.77,8.89) v1(65.13,43.42) v1(65.13,42.42) v1(65.79,24.62) v1(65.79,23.62) v1(65.77,9.89) v1(65.77,8.89) v1(66.42,52.97) v1(66.42,51.97) v1(66.79,24.62) v1(66.79,23.62) v1(67.42,52.97) v1(67.42,51.97) v1(72.14,24.62) v1(72.14,23.62) v1(73.14,24.62) v1(73.14,23.62) v1(73.91,44.96) v1(74.68,8.89) v1(74.8,34.78) v1(74.8,33.78) v1(75.8,34.78) v1(75.8,33.78) v1(76.2,8.89) v1(79.25,15.49) v1(81.28,20.07) v1(82.8,10.14) v1(82.8,9.14) v1(83.8,10.14) v1(83.8,9.14) v1(84.71,73.14) v1(84.71,72.14) v1(84.84,25.15) v1(84.8,10.14) v1(84.8,9.14) v1(85.71,73.14) v1(85.71,72.14) v1(85.8,10.14) v1(85.8,9.14) v1(87.25,53.07) v1(87.25,52.07) v1(87.25,41.39) v1(87.25,40.39) v1(88.25,53.07) v1(88.25,52.07) v1(88.25,41.39) v1(88.25,40.39)
VBAT: length 6.7
  TOP w0.508: Q10.2 14.45,5.8 J03.2
VCC: length 52.9
  TOP w0.254: TP03.1 R27.2
  TOP w0.508: 6.25,44.98 6.67,45.4 C12.1 11.43,45.4 11.94,44.89 11.94,42.01 12.45,41.5 L01.2 23.78,41.5 24.5,40.78 C20.1 R27.2 28.19,38.8 28.7,38.29 28.7,33.02 28.23,32.55 U04.1 ; 6.25,44.98 C13.1 6.25,43.02 4.8,41.57 C21.1 R28.2 ; 6.25,44.98 5.95,45.28 Q03.2
VIN: length 55.3
  TOP w0.254: TP05.1 31.45,14
  TOP w0.508: R51.1 31.75,14.3 31.24,13.79 31.24,8.13 ; 31.24,8.13 35.31,8.13 36.5,6.93 ; 31.24,8.13 27.43,8.13 26.5,7.2 ; R54.1 39,10.55 36.5,8.05 36.5,6.93 ; 26.5,7.2 25.57,8.13 23.11,8.13 22.61,8.64 22.61,15.49 22.1,16 14.48,16 13.78,16.7 D12.1 ; 26.5,7.2 J02.1 ; J02.3 36.5,6.93
ADC_VBAT: length 54.6
  TOP w0.254: R62.2 v1(20.5,14.4) ; v1(24.31,14.4) 24.31,16.18 24.64,16.51 v1(33.53,16.51) ; U05.18 59.33,27.69 42.16,27.69 v1(41.15,26.67)
  BOTTOM w0.254: v1(41.15,26.67) 40.64,26.16 35.81,26.16 34.04,24.38 34.04,17.02 v1(33.53,16.51) ; v1(20.5,14.4) v1(24.31,14.4)
ADC_VIN: length 39.8
  TOP w0.254: v1(42.15,26.16) 43.17,27.18 59.53,27.18 U05.19 ; R52.2 v1(35,16.51)
  BOTTOM w0.254: v1(35,16.51) 34.54,16.97 34.54,24.12 36.11,25.7 41.69,25.7 v1(42.15,26.16)
BAT_PWR: length 67.5
  TOP w0.254: U05.15 58.74,29.21 31.75,29.21 30.48,27.94 v1(30.48,25.15) ; R59.1 v1(11.15,11.2) ; v1(15.24,17.53) 15.24,24.13 16.26,25.15 v1(28.45,25.15)
  BOTTOM w0.254: v1(11.15,11.2) 11.81,11.2 11.83,11.18 14.22,11.18 15.24,12.19 v1(15.24,17.53) ; v1(28.45,25.15) v1(30.48,25.15)
BEEP: length 25.6
  TOP w0.254: v1(80.01,25.65) 79.76,25.4 79.76,17.53 80.78,16.5 R47.2 ; U05.32 71.37,27.69 77.22,27.69 77.98,26.92 v1(77.98,25.65)
  BOTTOM w0.254: v1(80.01,25.65) v1(77.98,25.65)
BOOT0: length 9.6
  TOP w0.254: U05.44 70.31,39.37 73.66,39.37 74,39.71 R22.1
DBG_LED: length 7.4
  TOP w0.254: U05.46 67.65,38.13 67.69,38.13 69.69,40.13 71.37,40.13 72,40.76 R21.1
FLASH_MISO: length 13.1
  TOP w0.254: R24.2 78,40.95 77.98,40.92 77.98,39.12 77.22,38.35 72.12,38.35 U05.40
FLASH_MOSI: length 11.1
  TOP w0.254: R23.2 76,39.42 75.44,38.86 71.92,38.86 U05.41
FLASH_NSS: length 17.3
  TOP w0.254: R26.2 82,38.06 81.28,37.34 72.55,37.34 70.52,35.3 70.48,35.3 69.77,34.59
FLASH_SCK: length 15.2
  TOP w0.254: U05.39 72.32,37.85 79.25,37.85 80.01,38.61 80.01,40.94 80,40.95 R25.2
GSM_LED: length 26.6
  TOP w0.254: U05.17 59.13,28.19 41.15,28.19 40.3,27.35 R40.1
GSM_PWR: length 32.6
  TOP w0.254: R30.1 36.94,31.9 38.1,30.73 57.01,30.73 57.66,31.38 v1(57.66,31.5) ; v1(57.66,34.04) 58.42,33.27 61.21,33.27 61.47,33.53 61.47,34.02 61.29,34.2 61.29,34.23 U05.10
  BOTTOM w0.254: v1(57.66,34.04) v1(57.66,31.5)
GSM_PWRKEY: length 64
  TOP w0.254: v1(33.27,43.27) 33.27,38.86 33.76,38.38 56.41,38.38 59.48,35.3 59.52,35.3 60.23,34.59 ; R11.2 8,48.13 8.64,47.5 12.45,47.5 13.21,46.74 13.21,44.2 13.67,43.73 30.63,43.73 31.1,43.27 v1(31.75,43.27)
  BOTTOM w0.254: v1(31.75,43.27) v1(33.27,43.27)
GSM_RX: length 56.6
  TOP w0.254: v1(29.21,45.21) 29.72,44.7 30.99,44.7 31.5,45.22 R18.2 R17.2 R16.1 27.85,47.7 27.35,47.2 Q06.3 ; U05.13 58.34,30.23 30.99,30.23 30.48,30.73 30.48,41.91 29.97,42.42 v1(29.21,42.42)
  BOTTOM w0.254: v1(29.21,42.42) v1(29.21,45.21)
GSM_TX: length 55
  TOP w0.254: 32.51,44.7 32.51,38.35 33.02,37.85 56.26,37.85 U05.12 ; 32.51,44.7 33.02,45.21 33.02,46.93 33,46.95 R19.2 R20.2 ; 32.51,44.7 32,44.2 23.37,44.2 23.11,44.45 v1(23.11,45.21) ; v1(20.83,45.21) 20.45,45.59 Q05.2
  BOTTOM w0.254: v1(20.83,45.21) v1(23.11,45.21)
KEY_IN: length 18.4
  TOP w0.254: R36.1 46.5,25.93 47.24,26.67 59.73,26.67 U05.20
NRST: length 23.7
  TOP w0.254: SW01.1 42.7,43 43.56,42.14 C14.1 45.18,41.39 45.21,41.36 45.21,39.37 45.72,38.86 58.75,38.86 60.9,36.72 60.93,36.72 U05.7
OSC_IN: length 15.2
  TOP w0.254: U05.5 59.18,39.88 54.61,39.88 54.18,40.31 C16.1 53.53,42.14 53.51,42.16 53.34,42.16 53.09,42.42 53.09,43.44 52.74,43.79 Y01.3
OSC_OUT: length 18.5
  TOP w0.254: U05.6 58.98,39.37 50.04,39.37 49.58,39.83 Y01.1 48.63,42.09 48.58,42.14 C15.1
RS485_DE: length 24.3
  TOP w0.254: R46.1 77.05,16.5 77.06,16.51 78.23,16.51 78.99,17.27 78.99,27.18 77.98,28.19 73.41,28.19 71.57,28.19 U05.33
RS485_LED: length 33.2
  TOP w0.254: U05.16 58.93,28.7 35.81,28.7 34.8,27.69 34.8,23.62 34.18,23 R39.1
RS485_RX: length 18.6
  TOP w0.254: R44.1 77.17,18.5 77.47,18.8 77.47,24.89 75.18,27.18 71.18,27.18 U05.31
RS485_TX: length 14.7
  TOP w0.254: U05.30 70.98,26.67 74.68,26.67 76.3,25.05 R41.1
RS485A: length 17.4
  TOP w0.508: R55.2 60.85,16.26 60.41,16.7 D13.2 ; R55.2 61.88,13.5 62.23,13.15 R49.2 ; R55.2 60.85,7.03 61.5,6.38 J02.8
RS485B: length 17.2
  TOP w0.508: R55.1 56.15,15.13 56.13,15.15 56.13,16 56.83,16.7 D13.1 ; R55.1 55.12,13.5 54.77,13.15 R48.2 ; R55.1 56.15,11.87 56.5,11.52 J02.7
STATUS_LED: length 40.1
  TOP w0.254: 60.23,31.41 58.54,29.72 30.99,29.72 29.46,28.19 29.46,23.62 28.84,23 R38.1
USER_KEY: length 20.7
  TOP w0.508: 49.5,11.18 48.48,10.16 41.91,10.16 41,11.07 D15.2 ; 49.5,11.18 49.5,6 J02.6 ; 49.5,11.18 D14.2
VGSM: length 110.7
  TOP w0.254: D04.2 10.2,70.35 10,70.55 TP01.1
  TOP w0.508: 17.4,65.41 16.9,65.9 U02.34 12.27,65.9 10.67,67.5 C07.1 ; 17.4,65.41 v1(26.8,65.41) ; 17.4,65.41 16.79,64.8 U02.35 11.4,64.8 10.7,65.5 C08.1 ; v1(37.08,57.91) 47.5,57.91 49,56.41 U01.1 ; C08.1 C07.1 ; C08.1 C09.1 9.3,59.08 8.72,58.5 C10.1 6.25,56.29 5,55.04 Q03.3 ; C07.1 9.3,68.5 10.2,69.4 D04.2 ; v1(36.83,72.64) 37,72.81 37,72.9 ; D01.1 27,72.47 26.92,72.39 36.49,72.39 37,72.9 ; 37,72.9 D02.1
  BOTTOM w0.508: 37.08,66.04 37.08,72.39 v1(36.83,72.64) ; 37.08,66.04 27.18,66.04 26.8,65.66 v1(26.8,65.41) ; 37.08,66.04 v1(37.08,57.91)
N425748: length 22.1
  TOP w0.508: U06.7 12.13,24.44 13,23.58 D12.2 D11.2 6.11,21.3 5.91,21.5 C32.2 ; C32.2 4.9,22.48 5.25,22.83 C31.1 ; C32.2 R43.1
N425772: length 10.4
  TOP w0.508: C28.1 16,31.68 ; 16,31.68 16,31.75 16.55,32.3 D06.2 L01.1 ; 16,31.68 14.94,32.74 U06.1
N425872: length 4.1
  TOP w0.508: U06.8 15.32,27.26 16,27.94 16,29.2 C28.2
N425896: length 3
  TOP w0.508: R34.2 10.3,25.28 10.87,25.85 U06.6
N425904: length 12.6
  TOP w0.254: R32.2 4.83,33.53 4.83,34.29 4.57,34.54 3.5,34.54 3.2,34.85 R28.1
  TOP w0.508: U06.4 7.59,32.74 6.35,31.5 R33.2 R32.2 ; C21.2 R28.1
N425936: length 7.9
  TOP w0.508: C19.1 C22.1 10.18,37.5 10.87,36.82 U06.3
N425988: length 2.5
  TOP w0.508: R43.2 C33.2
N426114: length 2
  TOP w0.508: C22.2 R29.2
N675915: length 10
  TOP w0.508: C30.1 23.3,27.5 22.61,28.19 22.61,34.04 23.02,34.45 U04.4
N679655: length 18.7
  TOP w0.254: U05.9 61.98,34.26 61.98,33.39 61.4,32.82 51.76,32.82 50.94,33.64 C27.1
  TOP w0.508: C27.1 C26.1 L02.2
N679821: length 34.2
  TOP w0.254: R50.1 85.87,14.5 87.12,15.75 87.12,27.43 85.85,28.7 71.81,28.7 70.16,30.35 70.13,30.35 U05.34
N679845: length 39.6
  TOP w0.254: R57.1 86.67,12.5 87.63,13.46 87.63,27.69 86.11,29.21 73.41,29.21 69.62,33 69.62,33.76 70.09,34.24 U05.37
N680958: length 10
  TOP w0.254: U05.3 61.21,39.26 61.21,41.36 61.18,41.39 C18.1 60.47,42.14 60.2,42.42 60.2,44.18 59.84,44.54 Y02.2
N680988: length 9
  TOP w0.254: C17.1 56.18,42.04 56.88,41.34 Y02.1 58.98,41.34 59.73,40.59 59.73,40.04 U05.4
N682371: length 18.7
  TOP w0.508: v1(72.9,11.18) 75.79,11.18 76.3,11.68 R56.2 ; R49.1 64,16.01 64.52,15.49 68.36,15.49 68.86,14.99 U07.6 68.86,12.41 v1(70.1,11.18)
  BOTTOM w0.508: v1(70.1,11.18) v1(72.9,11.18)
N682479: length 9.2
  TOP w0.508: U07.3 68.86,18.26 69.6,17.53 70.14,18.07 ; 70.14,18.07 U07.2 ; 70.14,18.07 71.7,16.5 R46.2
N682487: length 26.5
  TOP w0.508: R48.1 53,20.23 54.36,21.59 64.26,21.59 64.77,21.08 64.77,20.89 64.81,20.85 R42.1 65.79,20.07 66.04,19.81 66.04,17.02 66.55,16.51 69.12,16.51 70.14,15.49 U07.7
N693789: length 16.5
  TOP w0.254: R25.1 80,44.46 79.97,44.48 79.96,44.48 79.54,44.91 79.54,44.92 78.99,45.47 78.99,51.05 78.23,51.82 75.18,51.82 74.68,51.31 74.68,49.53 75.07,49.13 U03.6
N693827: length 7.9
  TOP w0.254: U03.3 82.92,49.13 83.31,49.53 83.31,53.09 82.7,53.7 R10.2
N693831: length 11
  TOP w0.254: U03.5 77.86,50.41 78.49,49.78 78.49,45.97 77.98,45.47 76.25,45.47 76,45.21 R23.1
N693881: length 9.7
  TOP w0.254: R09.2 75.04,53.7 74.17,52.83 74.17,48.77 75.07,47.87 U03.7
N693885: length 7.8
  TOP w0.254: R24.1 v1(78,44.68) ; U03.2 80.63,47.87 80.26,47.5 v1(80.26,45.21)
  BOTTOM w0.254: v1(78,44.68) 79.73,44.68 v1(80.26,45.21)
N693911: length 3.4
  TOP w0.254: U03.1 81.74,46.04 82,45.78 R26.1
N700450: length 17.2
  TOP w0.508: R50.2 80.29,14.5 79.5,13.72 79.5,7.11 78.74,6.35 74.92,6.35 74.25,5.68 J04.2
N700462: length 13.3
  TOP w0.508: J04.1 79.94,4.5 80.52,5.08 80.52,11.94 81.03,12.45 81.77,12.45 81.82,12.5 R57.2
N702312: length 2.9
  TOP w0.508: U04.3 26.8,35.13 26.5,35.43 R27.1
N733834: length 70.8
  TOP w0.508: 51.05,78.49 49.13,78.49 48.77,78.13 48.77,72.39 48.01,71.63 43.43,71.63 42.93,71.12 42.93,67.82 43.54,67.2 C03.1 45,63.54 44.06,62.6 U02.18 ; 51.05,78.49 50.55,77.98 DN01.6 ; 51.05,78.49 73.66,78.49 75.07,77.08 J01.1
N733870: length 27.6
  TOP w0.508: R07.2 53,71.46 52.45,72.01 DN01.3 53.13,74.2 53.61,74.68 68.83,74.68 69.99,73.52 J01.3
N733890: length 40.9
  TOP w0.508: R08.2 67.09,68.8 68.07,67.82 70.61,67.82 71.26,68.47 J01.6 71.26,74.79 69.85,76.2 53.73,76.2 53.13,76.8 DN01.4
N733894: length 34.7
  TOP w0.508: v1(68.72,72.76) 68.72,70.75 67.82,69.85 58.93,69.85 58.17,70.61 58.17,71.37 57.66,71.88 v1(54.36,71.88) ; J01.2 v1(72.53,72.76) ; DN01.1 50.55,72.92 50.55,72.92 v1(50.55,71.88) 49,70.34 R06.2
  BOTTOM w0.508: v1(72.53,72.76) v1(68.72,72.76) ; v1(54.36,71.88) v1(50.55,71.88)
N733954: length 26.9
  TOP w0.508: R07.1 C05.1 51,61.41 49.99,60.4 U02.16
N733962: length 32
  TOP w0.508: U02.15 53.97,59.3 55,60.33 C06.1 R08.1
N733966: length 21.8
  TOP w0.508: U02.17 46.01,61.5 47,62.49 C04.1 R06.1
N737146: length 16
  TOP w0.254: U02.6 22.95,55.54 22.35,56.13 16.26,56.13 15.5,55.38 R12.2
N742894: length 34.5
  TOP w0.508: v1(35.05,73.41) 35.05,74.65 R03.1 ; U02.41 27.21,58.2 28.19,59.18 28.19,65.53 30.73,68.07 34.54,68.07 35.05,68.58 v1(35.05,71.12)
  BOTTOM w0.508: v1(35.05,71.12) v1(35.05,73.41)
N742916: length 44.7
  TOP w0.508: R05.1 45,73.19 44.45,72.64 42.67,72.64 41.91,71.88 41.91,67.82 41.15,67.06 30.99,67.06 29.21,65.28 29.21,58.67 27.64,57.1 U02.42
N742971: length 2
  TOP w0.508: R02.1 28.22,76.3 28.17,76.25 D01.2
N743013: length 2
  TOP w0.508: R04.1 38.22,76.3 38.17,76.25 D02.2
N743392: length 3.2
  TOP w0.508: R04.2 39.78,74.7 40.28,74.2 Q02.3
N743399: length 2.3
  TOP w0.508: R05.2 44.13,76.3 43.63,76.8 Q02.1
N743403: length 2.3
  TOP w0.508: R03.2 34.22,76.3 33.72,76.8 Q01.1
N743407: length 3.2
  TOP w0.508: Q01.3 30.28,74.2 29.78,74.7 R02.2
N743623: length 11.4
  TOP w0.508: U02.39 11.63,60.4 11,59.77 Q04.3
N743725: length 3.8
  TOP w0.508: R11.1 8.78,51.8 8.8,51.82 9.4,51.82 10.05,51.16 Q04.1
N743818: length 7.4
  TOP w0.508: C01.1 R01.1 18.5,73.82 18.55,73.77 U02.32
N743850: length 10.2
  TOP w0.508: ANT01.1 R01.2 C02.1 D03.2
N763521: length 10.6
  TOP w0.254: R18.1 31.5,50.56 31.99,51.05 38.35,51.05 39,50.41 U01.6
N763565: length 12.4
  TOP w0.254: R19.1 33,50.05 33.49,50.55 36.58,50.55 37.08,50.04 37.08,48.01 37.34,47.75 40.75,47.75 41,48.01 U01.5
N763599: length 17.1
  TOP w0.254: R17.1 30,51.08 30.48,51.56 42.16,51.56 43,50.73 43,50.37 U01.4
N763631: length 13.7
  TOP w0.254: U01.3 45,47.54 44.7,47.24 36.58,47.24 36.32,47.5 36.32,48.77 35.79,49.3 R20.1
N767106: length 4
  TOP w0.508: R51.2 R52.1 R53.1
N767247: length 11.7
  TOP w0.254: TP04.1 R60.1
  TOP w0.508: D11.1 9.5,15.32 10.09,14.73 13.05,14.73 13.5,14.28 Q10.3 14.18,13.3 14.68,12.8 R60.1
N768259: length 4
  TOP w0.508: R62.1 R61.1 R60.2
N768827: length 10.8
  TOP w0.508: Q10.1 12.55,9.5 11.94,8.89 5.33,8.89 4.5,9.72 Q09.3
N768881: length 4.8
  TOP w0.508: R59.2 R58.2 7.22,12.8 6.72,13.3 Q09.1
N770522: length 43.1
  TOP w0.254: Q07.3 32.08,36.5 31.5,37.08 31.5,42.16 30.48,43.18 13.46,43.18 12.7,43.94 12.7,46.48 12.19,46.99 7.62,46.99 6.86,47.75 6.86,50.55 6.35,51.05 4.55,51.05 4.05,50.55 Q03.1
N770558: length 7.3
  TOP w0.254: R31.2 R30.2 36,36 35.31,35.31 33.53,35.31 32.99,34.76 Q07.1
N773160: length 8.6
  TOP w0.508: R54.2 39,15.63 39.37,16 42.67,16 43.73,14.94 U08.1
N773184: length 5.8
  TOP w0.508: U08.4 43.73,22.05 44,22.32 R35.1 R36.2
N773276: length 9.6
  TOP w0.508: U08.2 46.27,11.68 45.76,11.18 42.93,11.18 42.42,11.68 42.42,14.09 41.91,14.6 D15.1
N774903: length 5.7
  TOP w0.508: LS01.2 82.2,25.2 Q08.3
N774939: length 4.8
  TOP w0.508: Q08.1 84.8,19.78 84.3,19.28 R45.2 R47.1
N798879: length 3.6
  TOP w0.508: U07.1 72.09,19.24 72.83,18.5 R44.2
N798889: length 9.3
  TOP w0.508: R41.2 73.86,21.34 68.07,21.34 67.59,20.86 U07.4
N803622: length 2.5
  TOP w0.508: D07.2 17.7,21.3 R37.2
N803626: length 2.5
  TOP w0.508: D08.2 24.7,21.3 R38.2
N803630: length 2.5
  TOP w0.508: D09.2 31.7,21.3 R39.2
N803634: length 2.5
  TOP w0.508: D10.2 38.7,21.3 R40.2
N806128: length 2
  TOP w0.254: R21.2 71.35,43.3 71.3,43.25 D05.2
N817284: length 34
  TOP w0.254: U02.40 13.07,59.3 12.45,58.67 12.45,53.09 12.95,52.58 12.95,47.75 13.72,46.99 13.72,44.45 13.97,44.2 16.75,44.2 ; R13.2 17,44.45 16.75,44.2 ; R15.1 R14.1 22,44.61 21.59,44.2 16.75,44.2
N822315: length 13
  TOP w0.254: U02.2 18.55,55.12 18.04,55.63 16.76,55.63 16.26,55.12 16.26,52.32 17,51.58 R13.1 17.65,49.3 18.15,49.8 Q05.3
N822319: length 10.8
  TOP w0.254: Q06.2 25.05,51.05 24.54,51.56 18.03,51.56 17.45,52.15 U02.1
N822323: length 5
  TOP w0.254: R14.2 21.11,49.3 20.32,48.51 18.8,48.51 18.54,48.26 18.54,47.21 Q05.1
N822327: length 4.8
  TOP w0.254: R15.2 23.88,49.3 24.66,48.51 26.52,48.51 26.95,48.95 Q06.1

## Copper pours and planes (outline as drawn; the poured copper is in the pictures)
GND on TOP, BOTTOM: 2,0.61 1.02,1.02 0.61,2 0.61,85 1.02,85.98 2,86.39 90,86.39 90.98,85.98 91.39,85 91.39,2 90.98,1.02 90,0.61

Small or netless copper shapes (teardrops, artwork), in the pictures only: 72 on TOP, 30 on BOTTOM

## Text on the board
Ref Des/Silkscreen Top: ModBusDTU_RevA.0 | Designed by lhmagic | All right reserved | 20181218
NCLEGEND-1-2: FIGURE | FINISHED_SIZE | 0.5 | 0.6 | 0.7 | 0.8001 | 1.1999 | 1.5 | 3.4 | DRILL CHART: TOP to BOTTOM | ALL UNITS ARE IN MILLIMETERS | PLATED | QTY | 6 | 265 | 16 | 8 | 5 | 4
